# EAGLE board Stopper_alap_V13 (EAGLE 7.5.0)
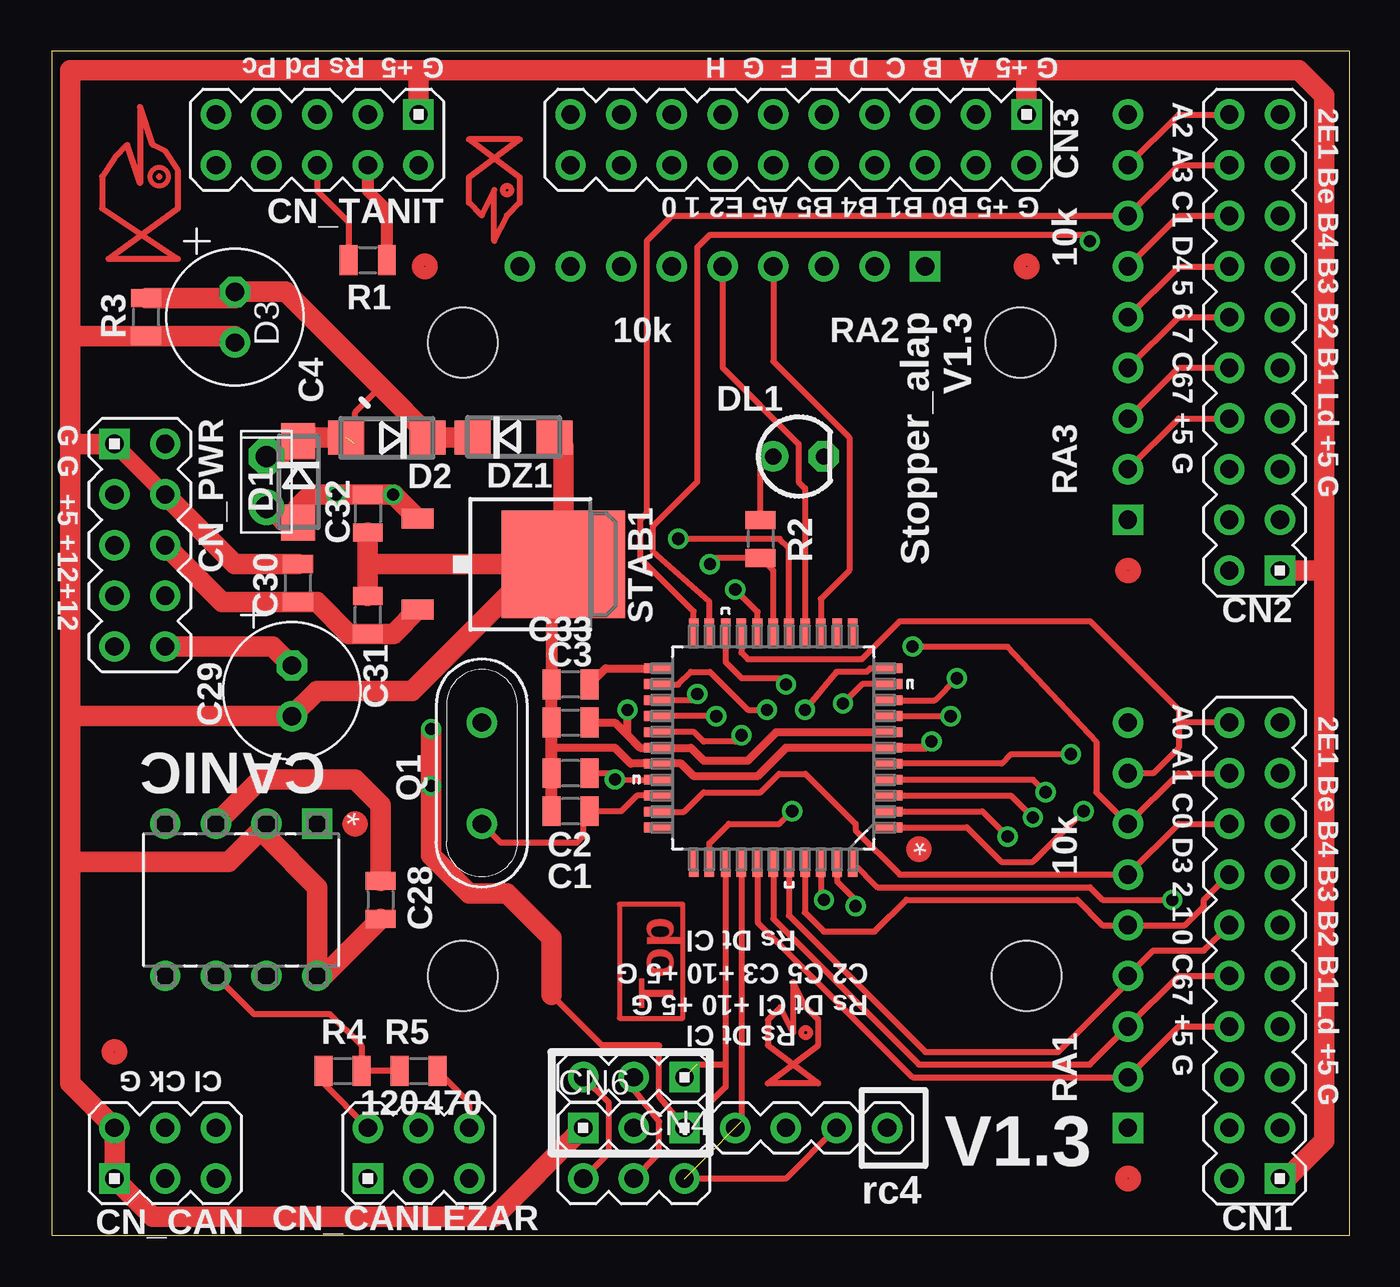
[diagram p0: board, top side]
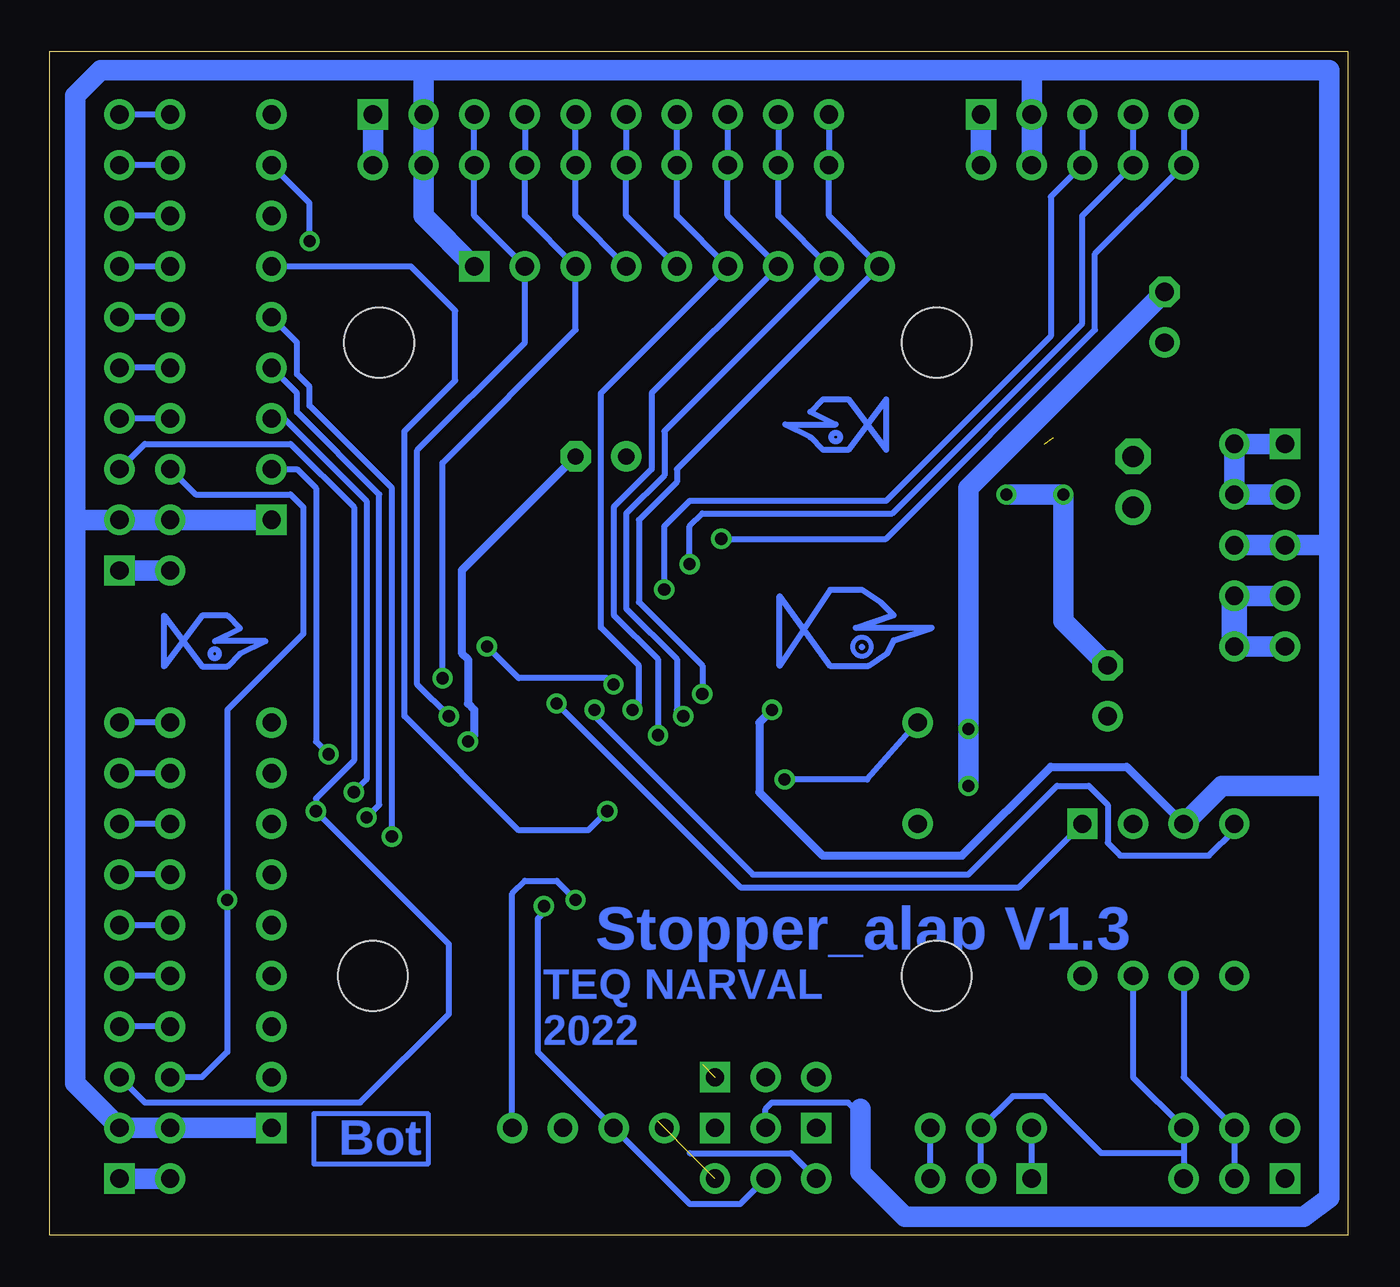
[diagram p1: board, bottom side, seen from below]

Size 65.07 x 59.36 mm. Coordinates in mm from the lower left corner, seen from the top.
Outline: 65.07,59.36 0,59.36 0,0 65.07,0 65.07,59.36
Copper layers (1*16): Top 0.035mm / dielectric 1.5mm / Bottom 0.035mm
Design rules "default": minimum track width 10mil, minimum drill 24mil, track to track 12mil, track to pad 12mil, pad to pad 12mil, via to via 12mil, smd to smd 0mil, copper to edge 40mil, drill to drill 8mil, minimum pad ring 10mil, minimum via ring 8mil, stop-mask expansion 4mil, vias tented up to drill 0mil, thermal gap 10mil
Net classes: 0 default: width 0.305 mm, clearance 0.305 mm
Holes 3.5 mm at 20.62,44.75 20.62,13 48.56,44.75 48.87,13
tRestrict: area 17.1,41.3 to 24.1,48.3; area 17.1,9.5 to 24.1,16.5; area 45.1,41.3 to 52.1,48.3; area 45.4,9.5 to 52.4,16.5
bRestrict: area 17.1,41.3 to 24.1,48.3; area 17.1,9.5 to 24.1,16.5; area 45.1,41.3 to 52.1,48.3; area 45.4,9.5 to 52.4,16.5

## Footprints (pad centres in the part's own frame; a part is rotated, then mirrored left to right if it is on the bottom)
R0805 = smd 0.9 x 1.5: 1 -0.953,0; 2 0.953,0
C_EL1RASZT07 = drill 0.914 pad 1.524 octagon: P+ 1.27,0 | drill 0.914 pad 1.524: P- -1.27,0
DIP254P762X432-8 = drill 0.914 pad 1.524 square: 1 -3.81,3.81 | drill 0.914 pad 1.524: 2 -3.81,1.27; 3 -3.81,-1.27; 4 -3.81,-3.81; 5 3.81,-3.81; 6 3.81,-1.27; 7 3.81,1.27; 8 3.81,3.81
PIN10_2 = drill 0.914 pad 1.524 square: 1 -10.16,0 | drill 0.914 pad 1.524: 2 -10.16,2.54; 3 -7.62,0; 4 -7.62,2.54; 5 -5.08,0; 6 -5.08,2.54; 7 -2.54,0; 8 -2.54,2.54; 9 0,0; 10 0,2.54; 11 2.54,0; 12 2.54,2.54; 13 5.08,0; 14 5.08,2.54; 15 7.62,0; 16 7.62,2.54; 17 10.16,0; 18 10.16,2.54; 19 12.7,0; 20 12.7,2.54
PIN03_1 = drill 0.914 pad 1.524 square: 1 -2.54,0 | drill 0.914 pad 1.524: 2 0,0; 3 2.54,0
PIN03_2 = drill 0.914 pad 1.524 square: 1 -2.54,0 | drill 0.914 pad 1.524: 2 -2.54,2.54; 3 0,0; 4 0,2.54; 5 2.54,0; 6 2.54,2.54
PIN07_1 = drill 0.914 pad 1.524 square: 1 -7.62,0 | drill 0.914 pad 1.524: 2 -5.08,0; 3 -2.54,0; 4 0,0; 5 2.54,0; 6 5.08,0; 7 7.62,0
PIN05_2 = drill 0.914 pad 1.524 square: 1 -5.08,0 | drill 0.914 pad 1.524: 2 -5.08,2.54; 3 -2.54,0; 4 -2.54,2.54; 5 0,0; 6 0,2.54; 7 2.54,0; 8 2.54,2.54; 9 5.08,0; 10 5.08,2.54
DO214AC = smd 1.8 x 1.7: A 2.05,0; C -2.05,0
D1RASZTNAGY = drill 1.067 pad 1.778: P$1 -1.27,0 | drill 1.067 pad 1.778 octagon: P$2 1.27,0
LED3MM = drill 0.813 pad 1.524: A -1.27,0 | drill 0.813 pad 1.524 octagon: K 1.27,0
QFP80P1200X1200X120-44N = smd 1.473 x 0.483: 1 -5.74,3.988; 2 -5.74,3.2; 3 -5.74,2.388; 4 -5.74,1.6; 5 -5.74,0.787; 6 -5.74,0; 7 -5.74,-0.787; 8 -5.74,-1.6; 9 -5.74,-2.388; 10 -5.74,-3.2; 11 -5.74,-3.988; 23 5.74,-3.988; 24 5.74,-3.2; 25 5.74,-2.388; 26 5.74,-1.6; 27 5.74,-0.787; 28 5.74,0; 29 5.74,0.787; 30 5.74,1.6; 31 5.74,2.388; 32 5.74,3.2; 33 5.74,3.988 | smd 0.483 x 1.473: 12 -3.988,-5.74; 13 -3.2,-5.74; 14 -2.388,-5.74; 15 -1.6,-5.74; 16 -0.787,-5.74; 17 0,-5.74; 18 0.787,-5.74; 19 1.6,-5.74; 20 2.388,-5.74; 21 3.2,-5.74; 22 3.988,-5.74; 34 3.988,5.74; 35 3.2,5.74; 36 2.388,5.74; 37 1.6,5.74; 38 0.787,5.74; 39 0,5.74; 40 -0.787,5.74; 41 -1.6,5.74; 42 -2.388,5.74; 43 -3.2,5.74; 44 -3.988,5.74
XTAL_QS = drill 0.914 pad 1.524: 1 -2.54,0; 2 2.54,0
R0805@1 = smd 0.9 x 1.5: 1 -0.953,0; 2 0.953,0
R_ARRAY = drill 0.914 pad 1.524 square: P$1 -10.16,0 | drill 0.914 pad 1.524: P$2 -7.62,0; P$3 -5.08,0; P$4 -2.54,0; P$5 0,0; P$6 2.54,0; P$7 5.08,0; P$8 7.62,0; P$9 10.16,0
TO252 = smd 1 x 1.6: 1 -2.28,-4.8; 2 2.28,-4.8 | smd 5.4 x 6.2: 3 0,2.5

## Placement (x,y rotation side)
C1  22  [R0805]  26.02,21.26 180 top
C2  22  [R0805]  26.02,23.16 180 top
C3  10u  [R0805]  26.02,27.61 180 top
C4  100u  [C_EL1RASZT07]  9.19,46.02 90 top
C28  100n  [R0805]  16.49,16.82 270 top
C29  100u  [C_EL1RASZT07]  12.04,27.29 90 top
C30  10u  [R0805]  12.36,32.69 90 top
C31  100n  [R0805]  15.86,31.1 90 top
C32  100n  [R0805]  15.86,36.18 270 top
C33  100n  [R0805]  26.02,25.71 0 top
CANIC  MCP2551  [DIP254P762X432-8]  9.51,16.82 270 top
CN1  PIN10_2  [PIN10_2]  61.57,13.01 90 top
CN2  PIN10_2  [PIN10_2]  61.57,43.48 90 top
CN3  PIN10_2  [PIN10_2]  38.71,56.18 180 top
CN4  PIN03_1  [PIN03_1]  29.19,7.92 180 top
CN5  PIN03_2'THT'  [PIN03_2]  29.19,5.38 180 top
CN6  PIN07_1  [PIN07_1]  34.27,5.38 0 top
CN_CAN  [PIN03_2]  5.7,2.84 0 top
CN_CANLEZAR  [PIN03_2]  18.39,2.84 0 top
CN_PWR  PIN05_2'THT'  [PIN05_2]  3.15,34.59 270 top
CN_TANIT  PIN05_2'THT'  [PIN05_2]  13.32,56.18 180 top
D1  DDO214AC  [DO214AC]  12.36,37.77 270 top
D2  DDO214AC  [DO214AC]  16.81,39.99 180 top
D3  D1RNAGY  [D1RASZTNAGY]  10.78,37.77 90 top
DL1  LED3MM  [LED3MM]  37.45,39.04 0 top
DZ1  DZDO214AC  [DO214AC]  23.16,39.99 0 top
PIC1  PIC18F45K80  [QFP80P1200X1200X120-44N]  36.17,24.44 180 top
Q1  [XTAL_QS]  21.57,23.16 270 top
R1  2.2k  [R0805@1]  15.86,48.88 0 top
R2  [R0805@1]  35.54,34.91 270 top
R3  [R0805@1]  4.74,46.02 90 top
R4  120  [R0805@1]  14.59,8.24 0 top
R5  470  [R0805@1]  18.39,8.24 0 top
RA1  10k  [R_ARRAY]  53.95,15.54 90 top
RA2  10k  [R_ARRAY]  33.63,48.56 180 top
RA3  10k  [R_ARRAY]  53.95,46.02 90 top
STAB1  7805DT  [TO252]  23.16,33.64 270 top

## Library data of the parts
C1-C4 C28-C33 Q1 R1-R5 = Cf_RLCPX
CANIC = Microchip_By_element14_Batch_1; DESCRIPTION: CAN CTRL; MPN: MCP2551-I/P; OC_FARNELL: 1292240; OC_NEWARK: 61K2947; PACKAGE: PDIP-8; SUPPLIER: Microchip
CN1-CN6 CN_CAN CN_CANLEZAR CN_PWR CN_TANIT = Cf_Csatl
D1-D3 DL1 DZ1 = Cf_Felv
PIC1 = narval; DESCRIPTION: 8BIT MCU; MPN: PIC18F4580-I/PT; OC_FARNELL: 1528449; OC_NEWARK: 71J7258; PACKAGE: TQFP-44; SUPPLIER: Microchip
RA1-RA3 = narval
STAB1 = linear

## Nets
+5V: C28.1 C30.1 C31.1 C33.2 CANIC.3 CN1.3 CN1.4 CN2.3 CN2.4 CN3.3 CN3.4 CN5.3 CN6.2 CN_PWR.5 CN_PWR.6 CN_TANIT.3 CN_TANIT.4 PIC1.7 PIC1.28 R1.2 RA1.P$1 RA2.P$1 RA3.P$1 STAB1.2
+12V: C29.P+ C32.1 CN_PWR.7 CN_PWR.8 CN_PWR.9 CN_PWR.10 D1.A D3.P$1 STAB1.1
GND: C1.2 C2.2 C3.2 C4.P- C28.2 C29.P- C30.2 C31.2 C32.2 C33.1 CANIC.2 CANIC.8 CN1.1 CN1.2 CN2.1 CN2.2 CN3.1 CN3.2 CN5.5 CN6.1 CN_CAN.1 CN_CAN.2 CN_PWR.1 CN_PWR.2 CN_PWR.3 CN_PWR.4 CN_TANIT.1 CN_TANIT.2 DL1.K DZ1.A PIC1.6 PIC1.29 R3.1 STAB1.3
N$1: C3.1 PIC1.23
N$2: CN_TANIT.5 CN_TANIT.6 PIC1.18 R1.1
N$3: CN_TANIT.7 CN_TANIT.8 PIC1.17 R2.2
N$4: DL1.A R2.1
N$5: C1.1 PIC1.31 Q1.2
N$6: C2.1 PIC1.30 Q1.1
N$7: C4.P+ CN5.1 CN6.3 D1.C D2.A D2.C D3.P$2 DZ1.C R3.2
N$8: CN1.17 CN1.18 PIC1.20 RA1.P$7
N$9: CN2.17 CN2.18 PIC1.22 RA3.P$7
N$10: CN2.19 CN2.20 PIC1.21 RA3.P$8
N$11: CN3.13 CN3.14 PIC1.24 RA2.P$6
N$12: CN6.7 PIC1.42
N$13: CN1.6 CN2.6 PIC1.44
N$14: CN1.19 CN1.20 PIC1.19 RA1.P$8
N$15: CN_CANLEZAR.5 CN_CANLEZAR.6 R5.2
N$16: CN_CANLEZAR.1 CN_CANLEZAR.2 R4.1
N$66: CN_TANIT.9 CN_TANIT.10 PIC1.16
N$67: CN3.15 CN3.16 PIC1.27 RA2.P$7
N$71: CN3.17 CN3.18 PIC1.26 RA2.P$8
N$99: CANIC.7 CN_CAN.5 CN_CAN.6 CN_CANLEZAR.3 CN_CANLEZAR.4
N$116: CN3.19 CN3.20 PIC1.25 RA2.P$9
N$117: CN2.7 CN2.8 PIC1.5 RA3.P$2
N$118: CN2.9 CN2.10 PIC1.4 RA3.P$3
N$120: CN2.11 CN2.12 PIC1.3 RA3.P$4
N$121: CN2.13 CN2.14 PIC1.2 RA3.P$5
N$122: CN1.13 CN1.14 PIC1.41 RA1.P$5
N$123: CN1.11 CN1.12 PIC1.40 RA1.P$4
N$124: CN1.9 CN1.10 PIC1.39 RA1.P$3
N$125: CN1.7 CN1.8 PIC1.38 RA1.P$2
N$126: CN1.5 CN2.5 PIC1.1
N$129: CN2.15 CN2.16 PIC1.35 RA3.P$6
N$130: CN1.15 CN1.16 PIC1.32 RA1.P$6
N$131: CANIC.6 CN_CAN.3 CN_CAN.4 R4.2 R5.1
N$132: CANIC.1 PIC1.10
N$135: CN3.11 CN3.12 PIC1.15 RA2.P$5
N$136: CN3.9 CN3.10 PIC1.14 RA2.P$4
N$137: CANIC.4 PIC1.11
N$139: CN3.7 CN3.8 PIC1.9 RA2.P$3
N$140: CN3.5 CN3.6 PIC1.8 RA2.P$2
N$344: CN4.2 CN5.4 CN6.5 PIC1.43
N$345: CN4.3 CN5.6 CN6.4 PIC1.37
SDI1: CN4.1 CN5.2 CN6.6 PIC1.36

## Tracks (layer width: path | path; a pad name or v marks a point on that pad's centre or on a via)
+5V  (via drill 0.61)
  Top 0.406: C33.2 28.24,25.71 28.87,25.07 | PIC1.7 36.33,25.22 34.9,23.8 32.68,23.8 32.05,24.44 PIC1.28 29.51,24.44 28.87,25.07 | 28.87,25.07 v28.87,26.34
  Top 0.61: CN_TANIT.4 15.86,52.38 16.81,51.42 R1.2
  Top 1.016: CN_PWR.6 8.55,31.74 C30.1 13.32,31.74 14.9,30.15 C31.1 17.14,30.15 STAB1.2 | CANIC.3 10.46,22.85 15.22,22.85 16.49,21.58 C28.1
  Bottom 0.305: CN6.2 29.19,6.34 28.87,6.66 25.06,6.66 24.43,6.02
  Bottom 0.406: v28.87,26.34 29.51,25.71 29.51,22.21 26.33,19.04 19.35,19.04 14.9,23.48 11.09,23.48 CANIC.3
  Bottom 1.016: CN_PWR.6 CN_PWR.5 0.93,34.6 | 0.93,34.6 0.93,58.41 15.86,58.41 | 15.86,58.41 46.33,58.41 | 46.33,58.41 62.53,58.41 63.8,57.14 63.8,35.86 | 63.8,35.86 63.8,7.61 CN1.3 CN1.4 RA1.P$1 | CN_TANIT.4 CN_TANIT.3 15.86,58.41 | 46.33,58.41 CN3.3 CN3.4 46.33,51.1 RA2.P$1 | RA3.P$1 CN2.4 CN2.3 63.8,35.86 | 0.93,22.53 0.93,1.89 2.2,0.94 22.21,0.94 24.43,3.16 24.43,6.02 24.43,6.34 | CANIC.3 6.33,22.53 0.93,22.53 | 0.93,22.53 0.93,34.6
+12V  (via drill 0.61)
  Top 0.305: 12.22,35.86 D1.A
  Top 0.813: D3.P$1 11.55,35.72 D1.A
  Top 1.016: CN_PWR.10 11.09,29.51 C29.P+ | D1.A 12.36,36.5 13,37.14 v14.27,37.14 C32.1 v17.12,37.14 17.14,37.14 STAB1.1
  Bottom 1.016: CN_PWR.9 CN_PWR.10 | C29.P+ 14.27,30.78 v14.27,37.14 v17.12,37.14 | CN_PWR.8 CN_PWR.7
  Bottom 1.27: CN_PWR.8 CN_PWR.10
GND  (via drill 0.61)
  Top 0.406: 25.06,24.44 28.24,24.44 29.03,23.65 PIC1.29 31.57,23.65 32.21,23.01 35.38,23.01 36.81,24.44 PIC1.6 43.79,24.44 v44.11,24.75
  Top 0.61: C1.2 C2.2 25.06,24.44 C33.1 C3.2 25.06,33.64 STAB1.3
  Top 0.813: CN_PWR.1 CN_PWR.4
  Top 1.016: CN_PWR.4 9.19,33.64 C30.2 | DZ1.A 25.66,39.54 25.66,34.28 | 25.66,34.28 STAB1.3 15.86,33.64 | C32.2 15.86,33.64 | 15.86,33.64 C31.2 | 25.66,34.28 25.06,34.28 18.08,27.29 13.32,27.29 C29.P- 0.93,26.02 | 0.93,18.72 0.93,7.61 CN_CAN.2 CN_CAN.1 5.06,0.94 22.21,0.94 CN6.1 | 0.93,26.02 0.93,39.68 | 18.39,58.41 0.93,58.41 0.93,45.07 | 18.39,58.41 49.19,58.41 | 49.19,58.41 62.53,58.41 63.8,57.14 63.8,33.32 | 63.8,33.32 63.8,4.75 61.89,2.84 CN1.1 | CN2.1 63.8,33.32 | CN3.1 48.88,58.09 49.19,58.41 | CN_TANIT.1 18.39,58.41 | CN_PWR.1 0.93,39.68 | 0.93,39.68 0.93,45.07 | C28.2 13.63,13.01 CANIC.8 13.32,17.45 10.78,19.99 CANIC.2 8.87,18.72 0.93,18.72 | C4.P- 9.19,45.07 R3.1 0.93,45.07 | 0.93,18.72 0.93,26.02
  Bottom 0.406: DL1.K 44.43,33.32 44.43,29.2 44.11,28.88 44.11,26.66 43.79,26.34 43.79,25.07 v44.11,24.75
  Bottom 1.016: CN_PWR.3 CN_PWR.4 CN_PWR.2 CN_PWR.1 | CN_TANIT.2 CN_TANIT.1 | CN3.2 CN3.1 | CN2.1 CN2.2 | CN1.2 CN1.1
HALACSKA1
  Top 0.305: 23.46,54.93 20.92,54.93 23.46,53.03 23.46,51.76 22.83,51.12 22.19,49.85 22.19,52.39 21.56,51.12 20.92,51.76 20.92,53.03 23.46,54.93
HALACSKA2
  Top 0.305: 38.44,7.62 35.9,7.62 38.44,9.52 38.44,10.79 37.81,11.43 37.17,12.7 37.17,10.16 36.54,11.43 35.9,10.79 35.9,9.52 38.44,7.62
HALACSKA3
  Bottom 0.305: 28.49,28.55 28.49,32.04 25.95,28.55 24.05,28.55 23.1,29.18 22.78,29.82 20.87,30.45 24.68,30.45 22.78,31.09 23.41,31.72 24.37,32.36 25.95,32.36 28.49,28.55
HALACSKA4
  Bottom 0.305: 23.14,39.37 23.14,41.91 25.04,39.37 26.31,39.37 26.95,40.01 28.22,40.64 25.68,40.64 26.95,41.28 26.31,41.91 25.04,41.91 23.14,39.37
HALACSKA5
  Top 0.305: 6.35,48.94 2.85,48.94 6.35,51.48 6.35,53.39 5.71,54.34 5.08,54.66 4.44,56.56 4.44,52.75 3.81,54.66 3.17,54.02 2.54,53.07 2.54,51.48 6.35,48.94
HALACSKA6
  Bottom 0.305: 59.34,28.52 59.34,31.06 57.44,28.52 56.17,28.52 55.53,29.15 54.26,29.79 56.8,29.79 55.53,30.42 56.17,31.06 57.44,31.06 59.34,28.52
N$1
  Top 0.406: C3.1 27.78,28.42 PIC1.23
N$2  (via drill 0.61)
  Top 0.305: PIC1.18 35.39,31.25 v34.27,32.37 | CN_TANIT.6 13.32,52.38 14.9,50.79 R1.1
  Bottom 0.305: v34.27,32.37 34.27,35.55 33,36.82 23.16,36.82 14.9,45.07 14.9,52.06 CN_TANIT.6 CN_TANIT.5
N$3  (via drill 0.61)
  Top 0.305: PIC1.17 36.17,33.32 R2.2 33.32,33.96 v33,33.64
  Bottom 0.305: CN_TANIT.7 CN_TANIT.8 13.32,51.1 13.32,45.71 22.84,36.18 32.36,36.18 33,35.55 v33,33.64
N$4
  Top 0.305: R2.1 35.54,38.4 DL1.A
N$5
  Top 0.305: Q1.2 22.52,19.67 26.33,19.67 26.65,19.99 26.65,21.58 C1.1 28.55,21.26 29.34,22.05 PIC1.31
N$6  (via drill 0.61)
  Top 0.305: PIC1.30 29.2,22.83 v28.24,22.85 27.92,23.16 C2.1
  Bottom 0.305: Q1.1 24.11,22.85 v28.24,22.85
N$7  (via drill 0.61)  (1 unrouted)
  Top 0.305: 15.22,39.68 15.22,41.26 16.49,42.53 | CN6.3 30.46,6.97 30.46,9.51 27.6,9.51 25.06,12.05
  Top 0.813: D3.P$2 11.58,39.04 D1.C
  Top 1.016: D2.C 19.03,39.99 | DZ1.C 19.03,39.99 | R3.2 9.19,46.98 C4.P+ 11.73,47.29 16.49,42.53 19.03,39.99 | 25.06,12.05 25.06,14.91 22.84,17.13 20.93,17.13 19.03,19.04 v19.03,25.39 v19.03,22.53 | D1.C 12.36,39.99 D2.A
  Bottom 1.016: v19.03,22.53 v19.03,25.39 19.03,37.45 C4.P+
N$8  (via drill 0.61)
  Top 0.305: PIC1.20 33.79,28.73 34.59,27.93 36.49,27.93 v36.81,27.61 | v43.16,29.51 47.92,29.51 52.37,24.75 52.37,22.21 RA1.P$7 56.49,23.16 CN1.18
  Bottom 0.305: v36.81,27.61 37.13,27.93 41.57,27.93 v43.16,29.51 | CN1.18 CN1.17
N$9
  Top 0.305: CN2.18 56.49,53.64 RA3.P$7 31.09,51.1 29.82,49.83 29.82,36.18 29.51,35.86 29.51,33.96 32.19,31.28 PIC1.22
  Bottom 0.305: CN2.18 CN2.17
N$10  (via drill 0.61)
  Top 0.305: RA3.P$8 56.49,56.18 CN2.20 | PIC1.21 32.97,31.76 30.14,34.28 30.14,35.55 32.36,37.77 32.36,49.52 33,50.15 51.73,50.15 v52.05,49.83
  Bottom 0.305: v52.05,49.83 52.05,51.74 RA3.P$8 | CN2.20 CN2.19
N$11  (via drill 0.61)
  Top 0.305: PIC1.24 30.46,27.61 31.41,27.61 32.05,28.25 33,28.25 34.9,26.34 v35.86,26.34
  Bottom 0.305: v35.86,26.34 35.54,26.66 35.54,28.56 37.45,30.47 37.45,42.21 RA2.P$6 33.63,51.1 CN3.14 CN3.13
N$12  (via drill 0.61)
  Top 0.305: PIC1.42 38.56,16.97 v38.71,16.82
  Bottom 0.305: CN6.7 41.89,17.13 41.25,17.77 39.67,17.77 v38.71,16.82
N$13  (via drill 0.61)
  Top 0.305: PIC1.44 41.41,17.45 52.05,17.45 52.68,16.82 v56.18,16.82
  Bottom 0.305: CN1.6 57.45,7.93 56.18,9.19 v56.18,16.82 56.18,26.34 52.37,30.15 52.37,36.5 53,37.14 57.76,37.14 CN2.6
N$14
  Top 0.305: PIC1.19 34.57,29.21 34.9,28.88 40.62,28.88 42.52,30.78 52.05,30.78 56.49,26.34 56.49,25.71 | 56.49,25.71 56.49,24.44 55.22,23.16 RA1.P$8 | CN1.20 56.49,25.71
  Bottom 0.305: CN1.20 CN1.19
N$15
  Top 0.305: R5.2 20.93,6.66 CN_CANLEZAR.6
  Bottom 0.305: CN_CANLEZAR.5 CN_CANLEZAR.6
N$16
  Top 0.305: CN_CANLEZAR.2 13.63,7.61 R4.1
  Bottom 0.305: CN_CANLEZAR.1 CN_CANLEZAR.2
N$66  (via drill 0.61)
  Top 0.305: PIC1.16 36.96,34.44 36.49,34.91 v31.41,34.91
  Bottom 0.305: CN_TANIT.9 CN_TANIT.10 12.68,49.2 12.68,45.39 23.16,34.91 v31.41,34.91
N$67  (via drill 0.61)
  Top 0.305: v34.59,25.07 34.27,24.75 32.68,24.75 32.21,25.22 PIC1.27
  Bottom 0.305: v34.59,25.07 34.59,28.88 36.81,31.1 36.81,36.5 34.9,38.4 34.9,42.21 RA2.P$7 31.09,51.1 CN3.16 CN3.15
N$71  (via drill 0.61)
  Top 0.305: v33.32,26.02 32.67,26.04 PIC1.26
  Bottom 0.305: v33.32,26.02 33.63,26.34 33.63,28.88 36.17,31.42 36.17,36.18 34.27,38.09 34.27,40.31 RA2.P$8 28.55,51.1 CN3.18 CN3.17
N$99
  Bottom 0.305: CANIC.7 10.78,7.93 CN_CAN.6 8.24,4.12 | 8.24,4.12 CN_CAN.5 | CN_CANLEZAR.3 CN_CANLEZAR.4 16.81,6.97 15.22,6.97 12.36,4.12 8.24,4.12
N$116  (via drill 0.61)
  Top 0.305: v32.36,27.13 32.05,26.82 PIC1.25
  Bottom 0.305: v32.36,27.13 32.36,28.56 35.54,31.74 35.54,35.86 33.63,37.77 33.63,38.4 RA2.P$9 26.02,51.1 CN3.20 CN3.19
N$117  (via drill 0.61)
  Top 0.305: v51.1,24.12 48.1,24.12 47.63,23.65 PIC1.5 | RA3.P$2 56.49,40.95 CN2.8
  Bottom 0.305: v51.1,24.12 51.73,24.75 51.73,37.45 52.68,38.4 RA3.P$2 | CN2.8 CN2.7
N$118  (via drill 0.61)
  Top 0.305: PIC1.4 49.2,22.83 v49.83,22.21 | RA3.P$3 56.49,43.49 CN2.10
  Bottom 0.305: RA3.P$3 53.32,40.95 49.19,36.82 49.19,22.85 v49.83,22.21 | CN2.10 CN2.9
N$120  (via drill 0.61)
  Top 0.305: v49.19,20.94 48.09,22.05 PIC1.3 | RA3.P$4 56.49,46.03 CN2.12
  Bottom 0.305: v49.19,20.94 48.56,21.58 48.56,37.14 52.68,41.26 52.68,42.21 RA3.P$4 | CN2.12 CN2.11
N$121  (via drill 0.61)
  Top 0.305: PIC1.2 41.94,21.26 46.65,21.26 v47.92,19.99 | RA3.P$5 56.49,48.57 CN2.14
  Bottom 0.305: v47.92,19.99 47.92,37.45 52.05,41.58 52.05,42.53 52.68,43.17 52.68,44.75 RA3.P$5 | CN2.14 CN2.13
N$122
  Top 0.305: PIC1.41 37.76,18.68 37.76,16.18 38.71,15.23 41.25,15.23 42.84,16.82 51.41,16.82 52.68,15.54 RA1.P$5 56.81,15.54 57.76,16.5 57.76,16.82 CN1.14
  Bottom 0.305: CN1.14 CN1.13
N$123
  Top 0.305: PIC1.40 36.96,16.03 43.79,9.19 50.46,9.19 53.95,12.69 RA1.P$4 55.22,14.27 57.76,14.27 CN1.12
  Bottom 0.305: CN1.12 CN1.11
N$124
  Top 0.305: PIC1.39 36.17,15.86 43.48,8.56 52.05,8.56 RA1.P$3 56.49,13.01 CN1.10
  Bottom 0.305: CN1.10 CN1.9
N$125
  Top 0.305: PIC1.38 35.39,15.7 43.16,7.93 RA1.P$2 56.49,10.46 CN1.8
  Bottom 0.305: CN1.8 CN1.7
N$126  (via drill 0.61)
  Top 0.305: PIC1.1 45.88,20.45 47.6,18.72 49.19,18.72 v51.73,21.26
  Bottom 0.305: CN2.5 60.3,39.68 53,39.68 49.83,36.5 49.83,23.8 51.73,21.89 v51.73,21.26 45.06,14.59 45.06,11.1 49.51,6.66 60.3,6.66 CN1.5
N$129  (via drill 0.61)
  Top 0.305: PIC1.35 32.97,19.65 33.95,20.62 36.49,20.62 v37.13,21.26 | RA3.P$6 56.49,51.1 CN2.16
  Bottom 0.305: v37.13,21.26 38.08,20.31 41.57,20.31 47.29,26.02 47.29,40.31 44.75,42.85 44.75,46.34 46.97,48.57 RA3.P$6 | CN2.16 CN2.15
N$130
  Top 0.305: PIC1.32 31.71,21.23 32.68,22.21 35.54,22.21 36.47,23.14 37.79,23.14 40.3,20.62 40.3,20.31 42.52,18.09 RA1.P$6 56.49,20.62 CN1.16
  Bottom 0.305: CN1.16 CN1.15
N$131
  Top 0.305: R5.1 R4.2 15.54,9.51 13.95,11.1 10.14,11.1 CANIC.6
  Bottom 0.305: CANIC.6 8.24,7.93 CN_CAN.4 CN_CAN.3
N$132  (via drill 0.61)
  Top 0.305: PIC1.10 40.64,27.64 v39.67,26.66
  Bottom 0.305: v39.67,26.66 30.46,17.45 16.49,17.45 CANIC.1
N$135
  Top 0.305: RA2.P$5 33.63,43.49 37.45,39.68 37.45,37.77 37.77,37.44 PIC1.15
  Bottom 0.305: RA2.P$5 36.17,51.1 CN3.12 CN3.11
N$136
  Top 0.305: RA2.P$4 36.17,43.8 39.98,39.99 39.98,33.32 38.56,31.9 PIC1.14
  Bottom 0.305: RA2.P$4 38.71,51.1 CN3.10 CN3.9
N$137  (via drill 0.61)
  Top 0.305: PIC1.11 41.04,28.42 40.86,28.25 39.35,28.25 v37.76,26.34
  Bottom 0.305: v37.76,26.34 37.76,26.02 29.82,18.09 19.03,18.09 14.59,22.53 13,22.53 12.04,21.58 12.04,19.67 11.41,19.04 6.97,19.04 5.7,20.31 CANIC.4
N$139  (via drill 0.61)
  Top 0.305: PIC1.9 44.28,26.82 v45.38,27.93
  Bottom 0.305: CN3.7 CN3.8 41.25,51.1 RA2.P$3 38.71,45.39 45.38,38.72 v45.38,27.93
N$140  (via drill 0.61)
  Top 0.305: PIC1.8 45.05,26.04 v45.06,26.02
  Bottom 0.305: CN3.5 CN3.6 43.79,51.1 RA2.P$2 41.25,44.75 46.65,39.36 46.65,27.61 v45.06,26.02
N$298
  Bottom 0.254: 51.83,3.57 51.83,6.11 46.11,6.11 46.11,3.57 51.83,3.57
N$312
  Top 0.254: 28.47,10.88 31.64,10.88 31.64,16.59 28.47,16.59 28.47,10.88
N$344  (via drill 0.61)
  Top 0.305: PIC1.43 39.38,17.74 40.3,16.82 v40.3,16.5 | CN5.4 30.46,4.12 30.46,5.7 29.19,7.29 CN4.2
  Bottom 0.305: CN5.4 30.46,1.57 33,1.57 CN6.5 40.62,9.19 40.62,15.86 40.3,16.18 v40.3,16.5
N$345  (2 unrouted)
  Top 0.305: PIC1.37 34.59,18.68 34.59,5.7 | CN4.3 27.92,6.66 27.92,4.12 CN5.6
  Bottom 0.305: 33,4.12 27.92,4.12 CN5.6
SDI1  (2 unrouted)
  Top 0.305: PIC1.36 33.79,8.56 | 33.79,8.56 33.79,7.44 33,6.66 33,4.12 | 32.36,8.56 33.79,8.56 | CN5.2 36.81,2.84 CN6.6
(copper drawn outside any net)
  shapes: Bottom circle x4, Top circle x11

## Text on the board
Top: Top
Bottom: Stopper_alap V1.3 | TEQ NARVAL / 2022 | Bot
Unrouted: a keretes 2x3 pól. a felülről ültetendő
tPlace: Stopper_alap / V1.3 | V1.3 | rc4
tNames: G +5 Rs Pd Pc | G +5 A B C D E F G H | A2 A3 C1 D4 5 6 7 C67 +5 G | 2E1 Be B4 B3 B2 B1 Ld +5 G | G +5 B0 B1 B4 B5 A5 E2 1 0 | G G +5 +12+12 | A0 A1 C0 D3 2 1 0 C67 +5 G | 2E1 Be B4 B3 B2 B1 Ld +5 G | Rs Dt Cl | C2 C5 C3 +10 +5 G | Rs Dt Cl / Rs Dt Cl +10 +5 G | Cl Ck G